# EAGLE board PRG_APT (EAGLE 7.5.0)
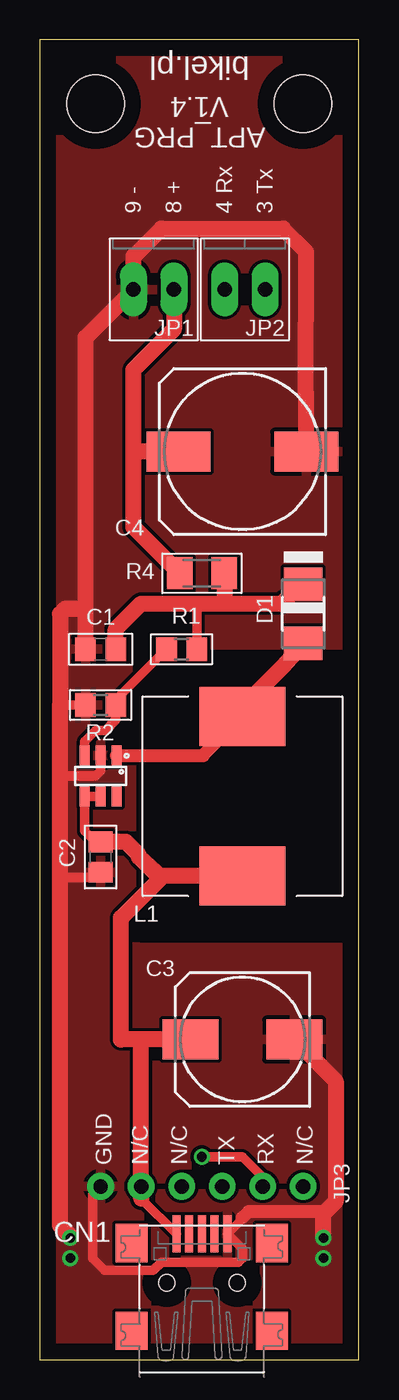
[diagram p0: board, top side]
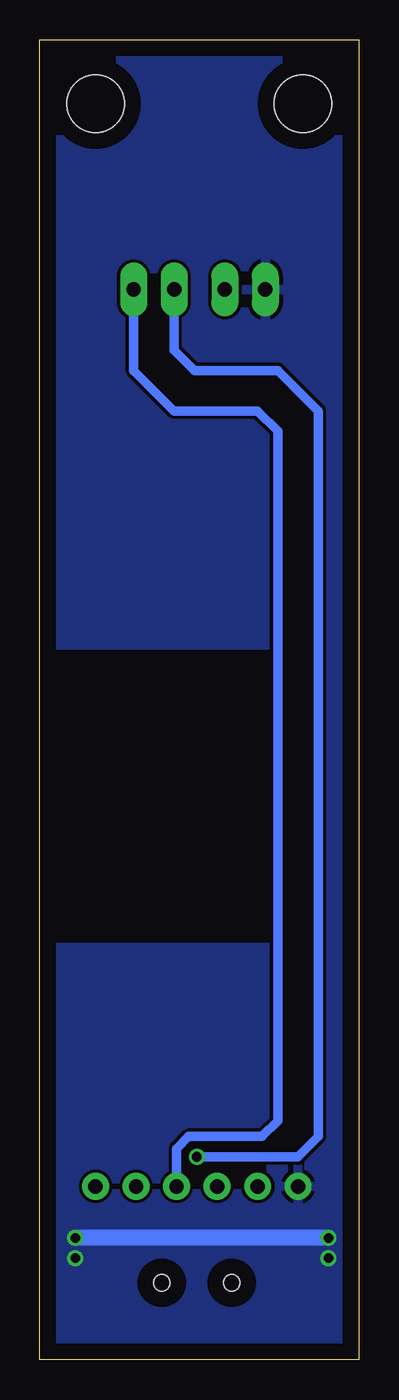
[diagram p1: board, bottom side, seen from below]

Size 20 x 82.67 mm. Coordinates in mm from the lower left corner, seen from the top.
Outline: 0,0 20,0 20,82.67 0,82.67 0,0
Copper layers (1*16): Top 0.035mm / dielectric 1.5mm / Bottom 0.035mm
Design rules "default": minimum track width 10mil, minimum drill 24mil, track to track 8mil, track to pad 8mil, pad to pad 8mil, via to via 8mil, smd to smd 8mil, copper to edge 40mil, drill to drill 8mil, minimum pad ring 10mil, minimum via ring 8mil, stop-mask expansion 4mil, vias tented up to drill 0mil, thermal gap 10mil
Holes 3.6 mm at 3.5,78.67 16.5,78.67

## Footprints (pad centres in the part's own frame; a part is rotated, then mirrored left to right if it is on the bottom)
C0805 = smd 1.3 x 1.5: 1 -0.95,0; 2 0.95,0
153CLV-0810 = smd 3.5 x 2.5: + 3.25,0; - -3.25,0
153CLV-1010 = smd 4 x 2.5: + 4,0; - -4,0
USB-MINIB = smd 0.5 x 2.308: D+ 0,4.364; D- -0.8,4.364; GND 1.6,4.364; ID 0.8,4.364; VBUS -1.6,4.364 | smd 2 x 2.4: GND1 -4.4,-1.7; GND2 -4.4,3.8; GND3 4.4,3.8; GND4 4.4,-1.7 | hole 1: -2.2,1.3; 2.2,1.3
DO-214AC = smd 2.1 x 2.4: A 1.85,0; C -1.85,0
SOT23-6 = smd 1.27 x 0.635: P$1 -1.27,1; P$2 -1.27,0; P$3 -1.27,-1; P$4 1.27,-1; P$5 1.27,0; P$6 1.27,1
ARK254-2 = drill 0.9 pad 1.676 long: 1 -1.27,0; 2 1.27,0
1X06 = drill 0.9 pad 1.676: 1 -6.35,0; 2 -3.81,0; 3 -1.27,0; 4 1.27,0; 5 3.81,0; 6 6.35,0
SLF12555T-102MR34-PF = smd 3.7 x 5.4: P$1 -5,0; P$2 5,0
R0805 = smd 1.3 x 1.5: 1 -0.95,0; 2 0.95,0
M1206 = smd 1.6 x 2: 1 -1.4,0; 2 1.4,0

## Placement (x,y rotation side)
C1  22uF  [C0805]  3.81,44.5 180 top
C2  22uF  [C0805]  3.81,31.48 270 top
C3  1000uF 16V  [153CLV-0810]  12.7,20.05 180 top
C4  220uF 50V  [153CLV-1010]  12.7,56.88 180 top
CN1  [USB-MINIB]  10.16,3.51 0 top
D1  SS34  [DO-214AC]  16.51,46.72 270 top
IC1  MT3608SOT23-6  [SOT23-6]  3.81,36.56 270 top
JP1  ARK254-2  [ARK254-2]  7.14,67.04 180 top
JP2  ARK254-2  [ARK254-2]  12.85,67.04 180 top
JP3  [1X06]  10.16,10.85 0 top
L1  22uH  [SLF12555T-102MR34-PF]  12.7,35.29 270 top
R1  100K  [R0805]  8.89,44.5 0 top
R2  2k2  [R0805]  3.81,41.01 0 top
R4  10R0  [M1206]  10.16,49.26 180 top

## Library data of the parts
C1-C4 R1 R2 R4 = resistor
CN1 = adafruit
D1 = diode
IC1 = mt3608
JP1 JP2 L1 = _marek
JP3 = pinhead

## Nets
+25V: C4.+ JP1.1 R4.2
GND: C1.2 C2.2 C3.- C4.- CN1.GND IC1.P$2 JP1.2 JP3.1 R2.1
N$2: D1.A IC1.P$1 L1.P$1
N$3: IC1.P$3 R1.1 R2.2
N$6: JP2.1 JP3.4
N$7: JP2.2 JP3.5
N$22: C1.1 D1.C R1.2 R4.1
V+: C2.1 C3.+ CN1.VBUS IC1.P$4 IC1.P$5 L1.P$2

## Tracks (layer width: path | path; a pad name or v marks a point on that pad's centre or on a via)
+25V
  Top 1.016: R4.2 5.87,52.15 5.87,56.88 | JP1.1 8.41,64.55 5.87,62.01 5.87,56.88 | C4.+ 5.87,56.88
GND  (via drill 0.6)
  Top 0.61: IC1.P$2 3.81,36.88 3.49,36.56 1.27,36.56 | C2.2 3.49,30.21 1.27,30.21 | R2.1 1.27,41.01 | JP3.1 3.3,10.34 3.3,6.35 4.06,5.59 7.11,5.59 7.62,6.1 12.45,6.1 12.7,6.35 12.7,6.93 CN1.GND 12.7,8.81 12.7,8.89
  Top 0.813: 17.91,9.27 13.08,9.27 12.7,8.89
  Top 1.016: v1.91,7.62 1.91,7.75 1.27,8.38 1.27,30.21 1.27,36.56 1.27,41.01 1.27,46.72 1.59,47.04 2.71,47.04 2.77,47.1 | 16.51,20.05 C3.- 18.54,17.46 18.54,9.91 17.91,9.27 17.78,9.14 v17.78,7.62 | C1.2 2.86,64.03 JP1.2 5.87,69.1 7.62,70.85 15.24,70.85 16.7,69.39 16.69,60.56 16.69,56.59 16.5,56.4
  Bottom 1.016: v1.91,7.62 v17.78,7.62
  other vias: 1.91,6.35 17.78,6.35
  pour Top: 0,82.28 20.32,82.28 20.32,0 0,0
  pour Bottom: -1.27,83.55 21.59,83.55 21.59,-1.27 -1.27,-1.27
N$1
  cutout Top: 6.35,44.18 19.05,44.18 19.05,26.4 6.35,26.4
N$2
  Top 0.61: L1.P$1 12.7,40.88
  Top 0.813: IC1.P$1 10.24,37.83 L1.P$1
  Top 1.016: D1.A 15.24,43.42 12.7,40.88
N$3
  Top 0.61: IC1.P$3 2.81,38.73 3.49,39.42 4.13,39.42 4.76,40.05 R2.2 4.76,41.32 R1.1
N$4
  cutout Bottom: 5.08,44.18 19.05,44.18 19.05,26.4 5.08,26.4
N$6
  Bottom 0.61: JP2.1 14.12,61.96 11.58,59.42 6.35,59.42 5.08,58.15 5.08,14.97 6.08,13.97 10.67,13.97 11.43,13.21 JP3.4
N$7  (via drill 0.6)
  Top 0.61: v10.16,12.7 12.7,12.7 13.97,11.43 JP3.5
  Bottom 0.61: JP2.2 11.58,63.23 10.31,61.96 5.08,61.96 2.54,59.42 2.54,13.97 3.81,12.7 v10.16,12.7
N$22
  Top 0.61: R1.2 9.84,47.03 10.16,47.35
  Top 1.016: C1.1 4.76,45.77 6.35,47.35 10.16,47.35 11.43,47.35 | 11.43,47.35 15.12,47.35 D1.C | R4.1 11.56,47.48 11.43,47.35
V+
  Top 0.61: IC1.P$5 IC1.P$4 2.81,33.12 3.81,32.12 C2.1 | CN1.VBUS 6.35,10.08
  Top 1.016: 6.22,31.48 7.62,30.21 5.08,27.67 5.08,20.05 6.35,20.05 | 6.22,31.48 6.22,31.61 5.4,32.43 C2.1 | L1.P$2 7.41,30.29 6.22,31.48 | C3.+ 6.35,20.05 | 6.35,10.08 6.35,20.05

## Text on the board
tNames: bikel.pl | APT_PRG / V1.4 | 9 - | 8 + | 4 Rx | 3 Tx | GND | N/C | N/C | TX | RX | N/C